# EAGLE board LT6656_BREAKOUT (EAGLE 7.2.0)
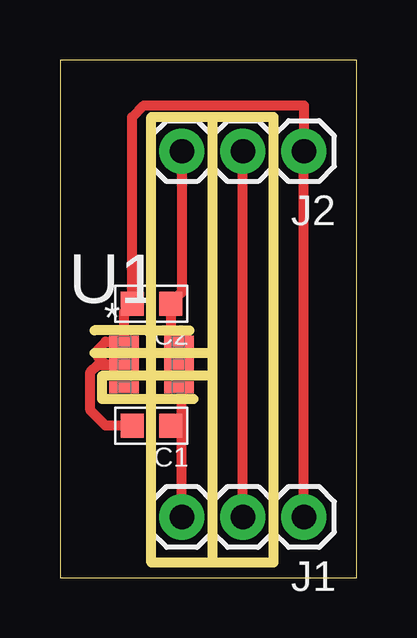
[diagram p0: board, top side]

Size 12.37 x 21.58 mm. Coordinates in mm from the lower left corner, seen from the top.
Outline: 0,0 12.37,0 12.37,21.58 0,21.58 0,0
Copper layers (1*16): Top 0.035mm / dielectric 1.5mm / Bottom 0.035mm
Design rules "default": minimum track width 10mil, minimum drill 24mil, track to track 8mil, track to pad 8mil, pad to pad 8mil, via to via 8mil, smd to smd 8mil, copper to edge 40mil, drill to drill 8mil, minimum pad ring 10mil, minimum via ring 8mil, stop-mask expansion 4mil, vias tented up to drill 0mil, thermal gap 10mil
Milling: 22 lines

## Footprints (pad centres in the part's own frame; a part is rotated, then mirrored left to right if it is on the bottom)
C0603-N = smd 0.95 x 1: 1 -0.8,0; 2 0.8,0
1X03 = drill 1.016 pad 1.88: 1 0,0; 2 2.54,0; 3 5.08,0
SOT95P280X100-6N = smd 1.219 x 0.508: 1 -1.143,0.94; 2 -1.143,0; 3 -1.143,-0.94; 4 1.143,-0.94; 5 1.143,0; 6 1.143,0.94

## Placement (x,y rotation side)
C1  [C0603-N]  3.81,6.35 180 top
C2  [C0603-N]  3.81,11.43 180 top
J1  [1X03]  10.16,2.54 180 top
J2  [1X03]  10.16,17.78 180 top
U1  LT6656ACS6-2.5TRMPBF  [SOT95P280X100-6N]  3.81,8.89 0 top

## Library data of the parts
C1 C2 = passives-7351
J1 J2 = SparkFun-Connectors
U1 = LTC_By_element14_Batch_1; MPN: LT6656ACS6-2.5#TRMPBF; OC_FARNELL: -; OC_NEWARK: 72R5841; PACKAGE: TSOT-6; SUPPLIER: Linear Technology

## Nets
GND: C1.2 C2.2 J1.1 J2.1 U1.1 U1.2
OUT: J1.2 J2.2
VIN: C1.1 J1.3 U1.4
VOUT: C2.1 J2.3 U1.6

## Tracks (layer width: path | path; a pad name or v marks a point on that pad's centre or on a via)
GND
  Top 0.406: J1.1 J2.1 10.16,19.68 3.49,19.68 3.01,19.2 C2.2 2.67,11.09 U1.1 2.65,9.84 1.91,9.84 1.59,9.53 1.59,9.21 1.91,8.89 U1.2 1.59,8.89 1.27,8.57 1.27,6.99 1.91,6.35 C1.2
OUT
  Top 0.406: J1.2 J2.2
VIN
  Top 0.406: J1.3 5.08,6.35 | 5.08,6.35 5.08,7.82 U1.4 | C1.1 5.08,6.35
VOUT
  Top 0.406: J2.3 5.08,11.9 C2.1 4.61,10.17 U1.6